# EAGLE board board-v2 (EAGLE 9.6.2)
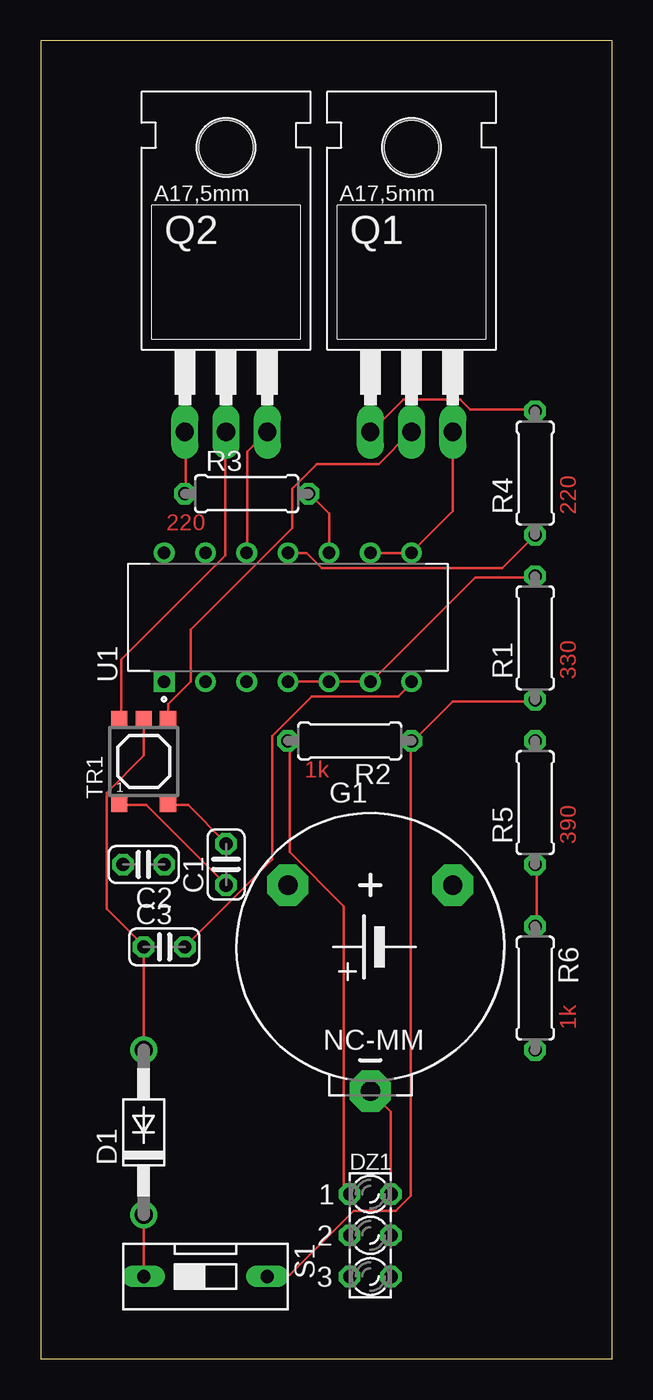
[diagram p0: board, top side]
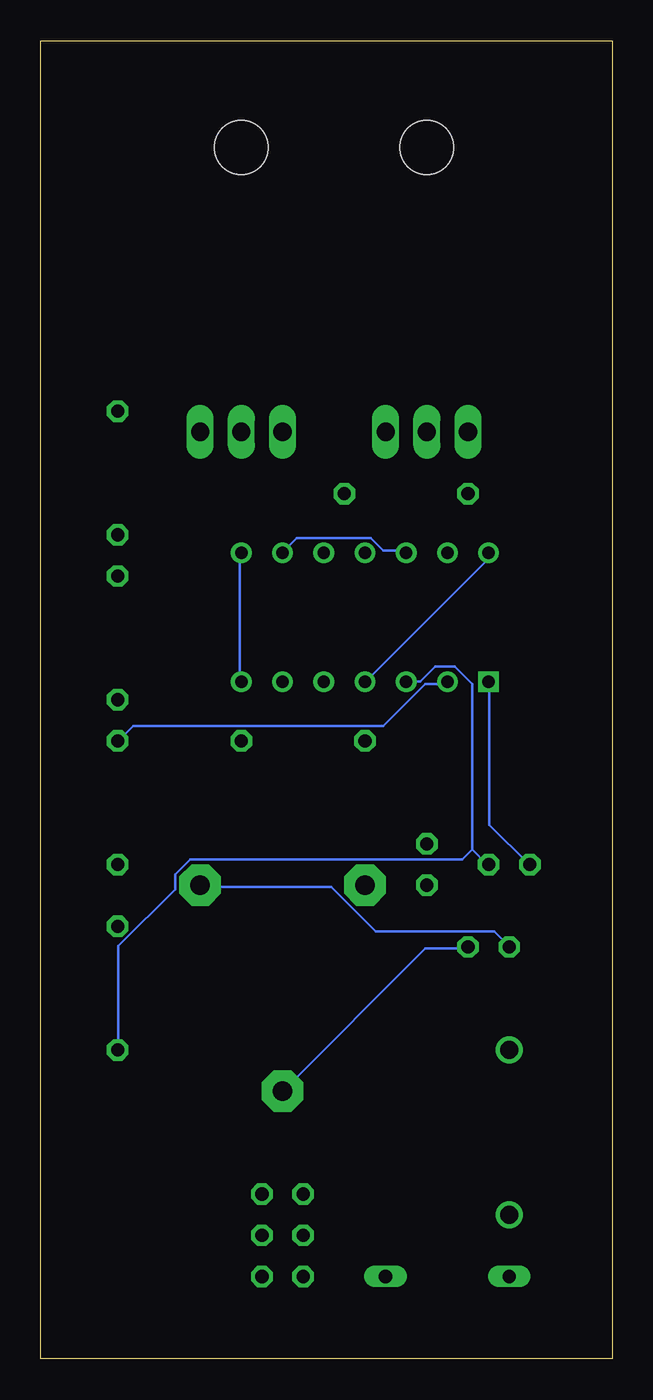
[diagram p1: board, bottom side, seen from below]

Size 35.23 x 81.27 mm. Coordinates in mm from the lower left corner, seen from the top.
Outline: 0,0 35.23,0 35.23,81.27 0,81.27 0,0
Copper layers (1*16): Top 0.035mm / dielectric 1.5mm / Bottom 0.035mm
Design rules "default": minimum track width 6mil, minimum drill 0.35mm, track to track 6mil, track to pad 6mil, pad to pad 6mil, via to via 6mil, smd to smd 6mil, copper to edge 40mil, drill to drill 6mil, minimum pad ring 10mil, minimum via ring 8mil, stop-mask expansion 4mil, vias tented up to drill 0mil, thermal gap 10mil

## Footprints (pad centres in the part's own frame; a part is rotated, then mirrored left to right if it is on the bottom)
C025-024X044 = drill 0.813 octagon: 1 -1.27,0; 2 1.27,0
DO41-10 = drill 1.118: A 5.08,0; C -5.08,0
LZR183 = drill 0.813 octagon: A1 -1.27,2.54; A2 -1.27,0; A3 -1.27,-2.54; K1 1.27,2.54; K2 1.27,0; K3 1.27,-2.54
NC-MM = drill 1.194 pad 2.54 octagon: + 5.08,3.81; +@1 -5.08,3.81; - 0,-8.89
TO220 = drill 1.118 long: 1 -2.54,-6.35; 2 0,-6.35; 3 2.54,-6.35 | hole 3.302: 0,11.176
0207/7 = drill 0.813 octagon: 1 -3.81,0; 2 3.81,0
DS-01 = drill 0.813 long: 1 0,-3.81; 2 0,3.81
MS40 = smd 1 x 1.1: 1 -1.5,-2.55; 2 -1.5,2.55; 3 0,2.55; 4 1.5,2.55; 5 1.5,-2.55
DIP794W45P254L1969H508Q14 = drill 0.77 pad 1.17 square: 1 -3.97,7.62 | drill 0.77 pad 1.17: 2 -3.97,5.08; 3 -3.97,2.54; 4 -3.97,0; 5 -3.97,-2.54; 6 -3.97,-5.08; 7 -3.97,-7.62; 8 3.97,-7.62; 9 3.97,-5.08; 10 3.97,-2.54; 11 3.97,0; 12 3.97,2.54; 13 3.97,5.08; 14 3.97,7.62

## Placement (x,y rotation side)
C1  0.1uF 600V  [C025-024X044]  11.43,30.48 90 top
C2  0.01uF  [C025-024X044]  6.35,30.48 180 top
C3  2200uF/25V  [C025-024X044]  7.62,25.4 0 top
D1  1N4004  [DO41-10]  6.35,13.97 90 top
DZ1  LZR183  [LZR183]  20.32,7.62 0 top
G1  NC-MM  [NC-MM]  20.32,25.4 0 top
Q1  IRF540  [TO220]  22.86,63.5 0 top
Q2  IRF540  [TO220]  11.43,63.5 0 top
R1  330Ω  [0207/7]  30.48,44.45 90 top
R2  1k Ω  [0207/7]  19.05,38.1 180 top
R3  220Ω  [0207/7]  12.7,53.34 0 top
R4  220Ω  [0207/7]  30.48,54.61 90 top
R5  390Ω  [0207/7]  30.48,34.29 90 top
R6  1kΩ  [0207/7]  30.48,22.86 270 top
S1  0  [DS-01]  10.16,5.08 270 top
TR1  MS40B  [MS40]  6.35,36.83 0 top
U1  CD4047BE  [DIP794W45P254L1969H508Q14]  15.24,45.72 90 top

## Library data of the parts
C1-C3 = rcl; SPICEPREFIX: C
D1 = diode
DZ1 = led
G1 = battery
Q1 Q2 = transistor-fet
R1-R6 = rcl; SPICEPREFIX: R
S1 = switch-dil; OC_FARNELL: unknown; OC_NEWARK: unknown
TR1 = inductor-neosid; OC_FARNELL: unknown; OC_NEWARK: unknown
U1 = CD4047BE; AVAILABILITY: In Stock; CHECK_PRICES: https://www.snapeda.com/parts/CD4047BE/Texas+Instruments/view-part/?ref=eda; DESCRIPTION: CMOS Low-Power Monostable/Astable Multivibrator; MF: Texas Instruments; MP: CD4047BE; PACKAGE: PDIP-14 Texas Instruments; PRICE: None; PURCHASE-URL: https://www.snapeda.com/api/url_track_click_mouser/?unipart_id=105099&manufacturer=Texas Instruments&part_name=CD4047BE&search_term=None; SNAPEDA_LINK: https://www.snapeda.com/parts/CD4047BE/Texas+Instruments/view-part/?ref=snap

## Nets
0: C3.2 DZ1.K1 G1.- Q1.3 Q2.3 U1.7 U1.8 U1.9 U1.12
N$2: C2.2 U1.1
N$3: R3.2 U1.10
N$4: Q2.1 R3.1
N$5: C3.1 D1.A G1.+ TR1.3
N$6: Q2.2 TR1.2
N$7: Q1.2 TR1.4
N$8: C1.2 TR1.5
N$9: C1.1 TR1.1
N$10: R1.1 R2.1 S1.2
N$11: R1.2 U1.4 U1.5 U1.6 U1.14
N$12: DZ1.A1 R2.2
N$13: R5.2 U1.2
N$14: C2.1 R6.2 U1.3
N$15: R5.1 R6.1
N$16: R4.1 U1.11
N$17: Q1.1 R4.2
N$18: D1.C S1.1

## Tracks (layer width: path | path; a pad name or v marks a point on that pad's centre or on a via)
0
  Top 0.152: DZ1.K1 21.59,15.24 G1.- | Q2.3 12.75,55.93 12.75,49.84 U1.12 | U1.9 20.37,49.68 22.81,49.68 U1.8 22.96,49.84 25.4,52.27 Q1.3 | C3.2 14.27,30.79 14.27,38.41 16.71,40.84 22.05,40.84 22.81,41.6 U1.7
  Bottom 0.152: G1.- 11.53,25.3 8.94,25.3 C3.2 | U1.7 22.96,41.76 22.96,49.68 U1.8 | U1.12 12.75,49.84 14.12,49.84 14.88,50.6 19.46,50.6 20.22,49.84 U1.9
N$2
  Bottom 0.152: U1.1 7.57,41.6 7.57,32.92 5.13,30.48 C2.2
N$3
  Top 0.152: U1.10 17.78,52.12 16.56,53.34 R3.2
N$4
  Top 0.152: R3.1 8.94,53.34 8.94,57.15 Q2.1
N$5
  Top 0.152: TR1.3 6.35,37.19 4.06,34.9 4.06,27.74 6.35,25.45 C3.1 D1.A
  Bottom 0.152: G1.+ 25.4,29.11 17.32,29.11 14.58,26.36 7.26,26.36 6.35,25.45 C3.1
N$6
  Top 0.152: TR1.2 4.98,39.47 4.98,43.13 11.38,49.53 11.38,57.15 Q2.2
N$7
  Top 0.152: TR1.4 7.87,39.47 7.87,40.39 9.25,41.76 9.25,44.96 15.49,51.21 15.49,53.65 17.02,55.17 20.83,55.17 22.81,57.15 Q1.2
N$8
  Top 0.152: TR1.5 7.87,34.14 9.09,34.14 11.38,31.85 C1.2
N$9
  Top 0.152: C1.1 6.5,34.14 4.98,34.14 TR1.1
N$10
  Top 0.152: S1.2 13.97,5.18 15.34,5.18 19.3,9.14 21.89,9.14 22.81,10.06 22.81,38.1 R2.1 22.96,38.1 25.4,40.54 30.43,40.54 R1.1
N$11
  Top 0.152: U1.5 15.34,41.76 U1.4 | U1.5 20.22,41.76 U1.6 20.37,41.76 26.77,48.16 30.43,48.16 R1.2 | U1.5
  Bottom 0.152: U1.14 7.72,49.68 7.72,49.23 15.19,41.76 U1.4
N$12
  Top 0.152: DZ1.A1 18.69,10.52 18.69,27.89 15.34,31.24 15.34,38.1 R2.2
N$13
  Bottom 0.152: U1.2 10.16,41.6 11.53,41.6 14.12,39.01 29.52,39.01 30.43,38.1 R5.2
N$14
  Bottom 0.152: 8.64,31.39 8.64,41.6 9.7,42.67 10.92,42.67 11.84,41.76 12.6,41.76 U1.3 | 8.64,31.39 7.72,30.48 C2.1 | 8.64,31.39 9.25,30.79 26.01,30.79 26.92,29.87 26.92,28.96 30.43,25.45 30.43,19.05 R6.2
N$15
  Top 0.152: R6.1 30.58,26.67 30.58,30.48 R5.1
N$16
  Top 0.152: R4.1 28.45,48.77 17.32,48.77 16.41,49.68 15.34,49.68 U1.11
N$17
  Top 0.152: R4.2 30.43,58.52 26.47,58.52 25.86,59.13 22.35,59.13 20.37,57.15 Q1.1
N$18
  Top 0.152: D1.C S1.1

## Text on the board
Top: 220 | 220 | 330 | 1k | 390 | 1k